# Altium PCB main.PcbDoc
Units mil, origin at the board's own origin, x right, y up, seen from the top; angles counter-clockwise.
Board outline 6000 x 4000 mil, 2 copper layers (Top Layer, Bottom Layer); 33 components, 25 nets, 214 pads, 0 vias.
Unrouted connection lines stored in the file: 136.
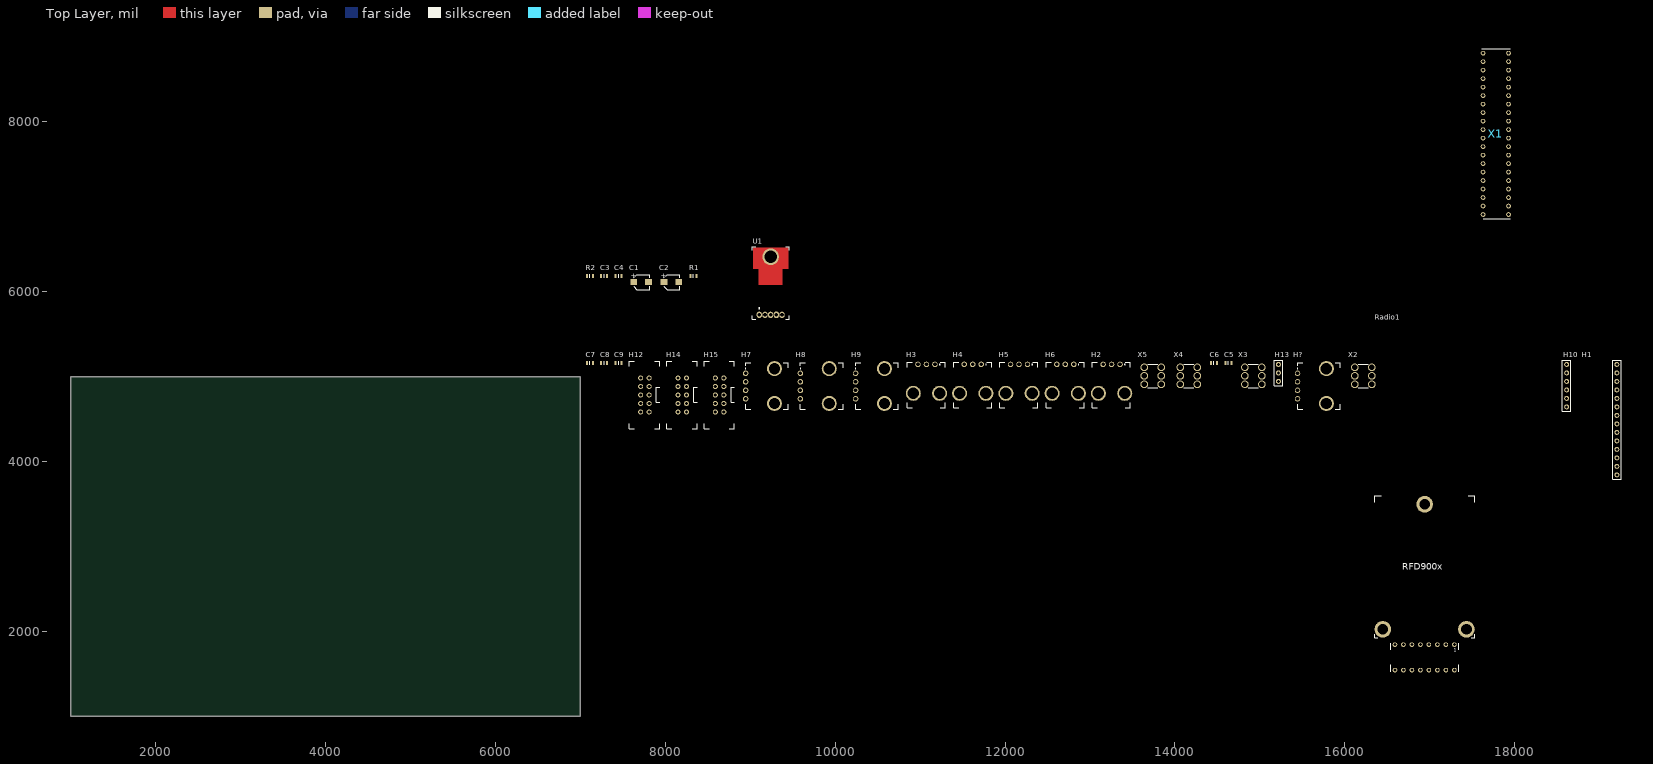
[diagram p0: Top Layer view]
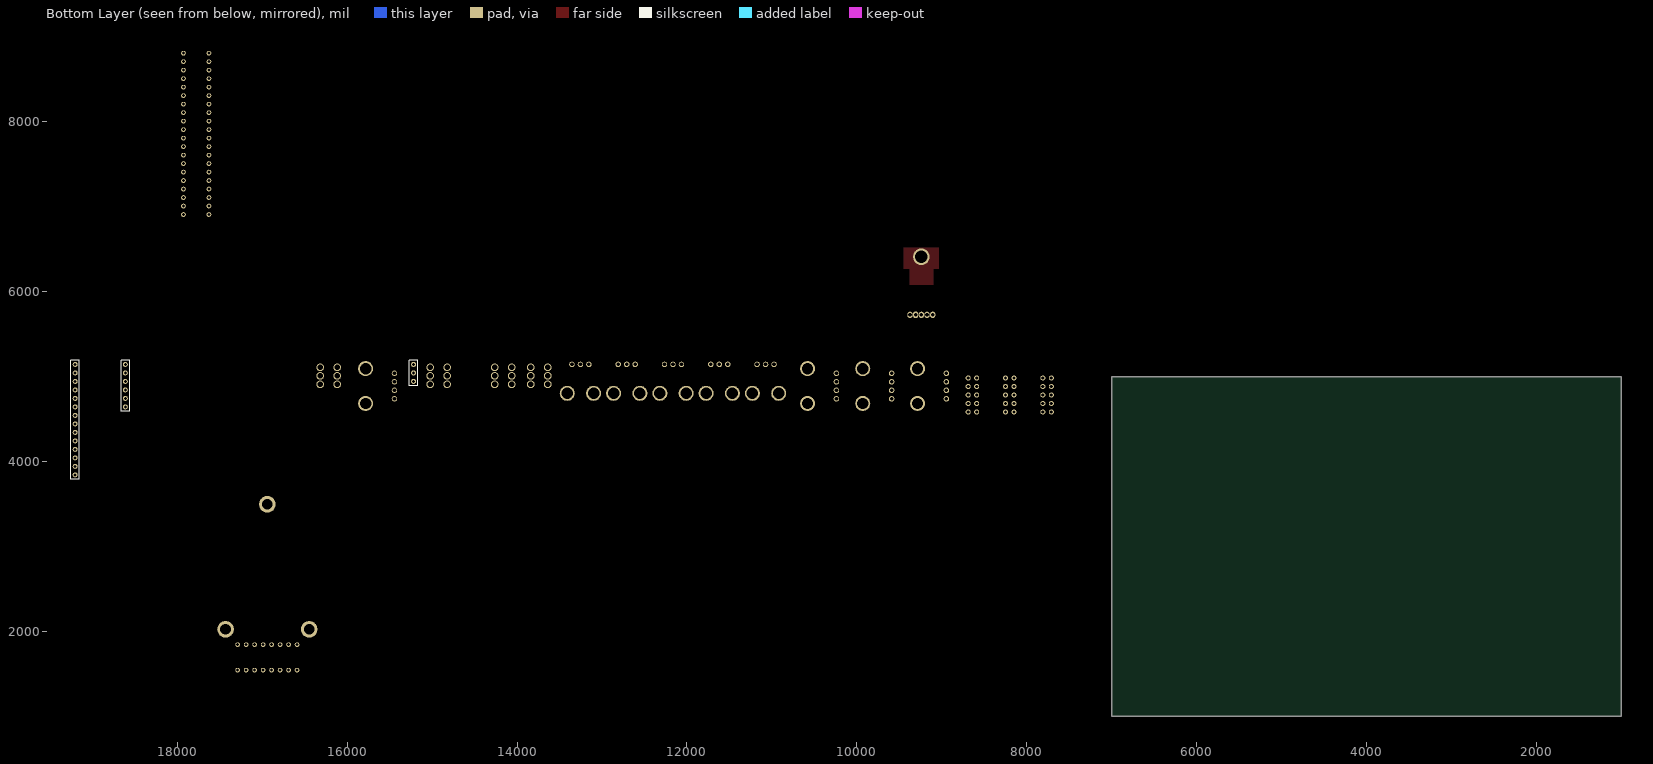
[diagram p1: Bottom Layer view, seen from below]

## Layer stack, top to bottom
Top Solder: solder mask 0.4, Solder Resist, Dk 3.5
Top Layer: signal copper 1.4
Dielectric 1: dielectric 12.6, FR-4, Dk 4.8
Bottom Layer: signal copper 1.4
Bottom Solder: solder mask 0.4, Solder Resist, Dk 3.5

## Board outline
1000,1000 7000,1000 7000,5000 1000,5000

## Design rules (kind name [scope] priority, off if disabled: settings)
BoardOutlineClearance [All] p1: gap=7.87 ignorepadtopadclearanceinfootprint=FALSE
Clearance "inPolygon Clearance" [InPolygon] p1: gap=11.81 ignorepadtopadclearanceinfootprint=TRUE // this rule ensures that every net within a polygon of a different net has a set clearance from the poly
Clearance "Different Diff Pair" [All] p2: gap=7.87 ignorepadtopadclearanceinfootprint=TRUE
Clearance "Same Diff Pair" [All] p3: gap=3.94 ignorepadtopadclearanceinfootprint=TRUE
Clearance "Different Nets" [not InAnyDifferentialPair] p4: gap=11.81 ignorepadtopadclearanceinfootprint=TRUE except(3.94: Arc-SMDPad Arc-THPad Arc-Via Arc-Text Track-SMDPad Track-THPad Track-Via Track-Text SMDPad-Text THPad-Text Via-Text Fill-Text Poly-Text Region-Text Text-Text; 4.72: Arc-Arc Arc-Track Track-Track; 5.91: SMDPad-SMDPad SMDPad-THPad SMDPad-Via THPad-THPad THPad-Via Via-Via; 7.87: Arc-Hole Track-Hole SMDPad-Hole THPad-Hole Via-Hole Fill-Hole Poly-Hole Region-Hole Text-Hole)
Clearance "Same Net" [not InAnyDifferentialPair] p5: gap=0 ignorepadtopadclearanceinfootprint=TRUE except(3.94: THPad-Via; 7.09: Arc-Arc Arc-Track Track-Track)
ComponentClearance [All] p1: gap=4 collisioncheckmode=3 verticalgap=4 showdistances=TRUE
DiffPairsRouting "Ethernet Routing" [InDifferentialPairClass('Ethernet_Pairs')] p1: maxlimit=7.87 minlimit=7.87 mostfreqgap=7.87 toplayer_minwidth=9.84 toplayer_maxwidth=9.84 toplayer_prefwidth=9.84 bottomlayer_minwidth=9.84 bottomlayer_maxwidth=9.84 bottomlayer_prefwidth=9.84 impedanceprofiledriven=TRUE impedanceprofileid={6C839EF7-FC3E-46DE-8B8A-5992B6406308} maxuncoupledlength=500
DiffPairsRouting "USB Routing" [InDifferentialPairClass('USB_Pairs')] p2: maxlimit=4.99 minlimit=4.99 mostfreqgap=4.99 toplayer_minwidth=9.07 toplayer_maxwidth=9.07 toplayer_prefwidth=9.07 bottomlayer_minwidth=9.07 bottomlayer_maxwidth=9.07 bottomlayer_prefwidth=9.07 impedanceprofiledriven=TRUE impedanceprofileid={44F334F2-7DCA-476F-8978-DAF7B35AC101} maxuncoupledlength=500
DiffPairsRouting "CAN Routing" [InDifferentialPairClass('CAN_Pairs')] p3: maxlimit=19.68 minlimit=19.68 mostfreqgap=19.68 toplayer_minwidth=7.93 toplayer_maxwidth=7.93 toplayer_prefwidth=7.93 bottomlayer_minwidth=7.93 bottomlayer_maxwidth=7.93 bottomlayer_prefwidth=7.93 impedanceprofiledriven=TRUE impedanceprofileid={655150C0-0DB8-45A2-9C08-8742605C1D3F} maxuncoupledlength=500
Height [All] p1: minheight=0 maxheight=71497.94 prefheight=500
HoleSize [All] p1: absolutevalues=TRUE maxlimit=248.03 minlimit=11.81 maxpercent=80.000 minpercent=20.000
HoleToHoleClearance [All] p1: gap=9.84 allowstackedmicrovias=FALSE
Length [All] p1: maxlimit=1709.92 minlimit=0 usedelayunits=TRUE mindelay=0.000000 maxdelay=10000.000000
MatchedLengths "Diff Pair Matched Delays" [InDifferentialPairClass('Ethernet_Pairs') or InDifferentialPairClass('USB_Pairs') or InDifferentialPairClass('CAN_Pairs')] p1: tolerance=196.85 checknetsindiffpair=TRUE checkdiffpairvsdiffpair=FALSE checkxsignals=FALSE checkothers=FALSE usedelayunits=TRUE delaytolerance=100.000000
MinimumAnnularRing [All] p1: minimumring=7.87
MinimumSolderMaskSliver [All] p1: minsoldermaskwidth=0
PlaneClearance "Supply Net Clearance" [InNetClass('Supply_Nets')] p1: clearance=19.68
PlaneClearance "All Nets" [All] p2: clearance=11.81
PolygonConnect "Supply Nets" [InNetClass('Supply_Nets')] p1: connectstyle=Direct reliefconductorwidth=11.81 reliefentries=4 polygonreliefangle="90 Angle" airgapwidth=10
PolygonConnect General [All] p2: connectstyle=Relief reliefconductorwidth=10 reliefentries=4 polygonreliefangle="90 Angle" airgapwidth=10
RoutingVias [All] p1: holewidth=7.87 width=13.78 viastyle="Through Hole" minholewidth=5.91 minwidth=11.81 maxholewidth=248.03 maxwidth=257.87
SilkToSilkClearance [All] p1: silktosilkclearance=0
SilkToSolderMaskClearance [All] p1: minsilkscreentomaskgap=0 clearancetoexposedcopper=TRUE
SolderMaskExpansion [All] p1: expansion=2.95 istentingtop=FALSE
SupplyNets "Schematic Supply Nets_8" [InNet('+1V1')] p1: voltage=0.000
SupplyNets "Schematic Supply Nets_7" [InNet('+3V3')] p2: voltage=0.000
SupplyNets "Schematic Supply Nets_3" [InNet('GND')] p3: voltage=0.000
SupplyNets "Schematic Supply Nets_5" [InNet('Local +5V')] p4: voltage=0.000
SupplyNets "Schematic Supply Nets_1" [InNet('Earth')] p5: voltage=0.000
SupplyNets "Schematic Supply Nets" [InNet('+12V')] p6: voltage=0.000
UnRoutedNet [All] p1: checkbadconnections=TRUE
Width [All] p1: maxlimit=3937.01 minlimit=3.94 preferedwidth=11.81
Width "nRF Width" [InNetClass('nRF Signal')] p2: maxlimit=14.94 minlimit=14.94 preferedwidth=14.94 impedanceprofiledriven=TRUE impedanceprofileid={F40AD8AA-2A64-4F02-A627-F394B910E812} minimp=50.000000 maximp=50.000000 favimp=50.000000 checkconnectedcopper=TRUE
20 further rules are at their usual default settings.

## Classes and differential pairs
net class "Motor VOUT": "Battery VIN"
component class Power: C1 C2 C3 C4 R1 R2 U1
component class Devices: C5 C6 C7 C8 C9 H1 H2 H3 H4 H5 H6 H7 H8 H9 H10 H12 H13 H14 H15 H? Radio1 X1 X2 X3 X4 X5

## Components (designator, comment, footprint, x,y, rotation, side; value= is the part's Value field where it differs from the comment)
C1 "SMD Polarized" "[Cap] SMD Polarized, 4mm" 7715,6115 r0 top
C2 "SMD Polarized" "[Cap] SMD Polarized, 4mm" 8070,6115 r0 top
C3 "SMD Nonpolarized" "[Cap] SMD 0805" 7280,6185 r0 top
C4 "SMD Nonpolarized" "[Cap] SMD 0805" 7450,6185 r0 top
C5 "SMD Nonpolarized" "[Cap] SMD 0805" 14630,5160 r0 top
C6 "SMD Nonpolarized" "[Cap] SMD 0805" 14460,5160 r0 top
C7 "SMD Nonpolarized" "[Cap] SMD 0805" 7110,5160 r0 top
C8 "SMD Nonpolarized" "[Cap] SMD 0805" 7280,5160 r0 top
C9 "SMD Nonpolarized" "[Cap] SMD 0805" 7450,5160 r0 top
H1 "1x14 Male Right Angle" "[Header] 1x14 Right Angle Male" 19205,3845 r90 top
H2 "171975-0003" "[Header] Shrouded 1x3 Right Angle Male" 13255,5145 r0 top
H3 "171975-0003" "[Header] Shrouded 1x3 Right Angle Male" 11075,5145 r0 top
H4 "171975-0003" "[Header] Shrouded 1x3 Right Angle Male" 11620,5145 r0 top
H5 "171975-0003" "[Header] Shrouded 1x3 Right Angle Male" 12165,5145 r0 top
H6 "171975-0003" "[Header] Shrouded 1x3 Right Angle Male" 12710,5145 r0 top
H7 "171975-0004" "[Header] Shrouded 1x4 Right Angle Male" 8945,4890 r90 top
H8 "171975-0004" "[Header] Shrouded 1x4 Right Angle Male" 9590,4890 r90 top
H9 "171975-0004" "[Header] Shrouded 1x4 Right Angle Male" 10240,4890 r90 top
H10 "1x6 Header" "[Header] 1x6 Male" 18615,4895 r90 top
H12 "2x5 Shrouded" "[Header] Shrouded 2x5 Male" 7755,4785 r90 top
H13 "1x3 Header" "[Header] 1x3 Male" 15220,5045 r90 top
H14 "2x5 Shrouded" "[Header] Shrouded 2x5 Male" 8195,4785 r90 top
H15 "2x5 Shrouded" "[Header] Shrouded 2x5 Male" 8635,4785 r90 top
H? "171975-0004" "[Header] Shrouded 1x4 Right Angle Male" 15445,4890 r90 top
R1 "[Res] SMD Resistor" "[Res] SMD 0805" 8330,6185 r0 top
R2 "[Res] SMD Resistor" "[Res] SMD 0805" 7110,6185 r0 top
Radio1 "RFDX900" "[Device] RFDX900 Radio" 16942.14,1694.49 r0 top
U1 "5V" "[Reg] Variable Voltage Regulator" 9240,6105 r0 top
X1 "Raspberry Pi 5" "[Device] Raspberry Pi 5" 17930,6910 r90 top
X2 "7461057" "[Port] Shank Connector (100A)" 16220,5010 r0 top
X3 "7461057" "[Port] Shank Connector (100A)" 14925,5010 r0 top
X4 "7461057" "[Port] Shank Connector (100A)" 14165,5010 r0 top
X5 "7461057" "[Port] Shank Connector (100A)" 13740,5010 r0 top

## Footprints (in the part's own frame and the unit in brackets; to place one, negate y for a bottom-side part, rotate by r counter-clockwise, add the part's x,y. Pads: shape width x height; smd on the part's side, far side on the other; paste and mask are expansions set on the pad)
"[Cap] SMD 0805" [mm]
  rect 0.6x1.25 smd: 1(-0.9,0) 2(0.9,0)
  silkscreen extent 0,-0.53 0,0.53, body extent -1,-0.63 1,0.63, height 1
"[Cap] SMD Polarized, 4mm" [mm]
  rect 2x1.8 smd: 1(-2.2,0) 2(2.2,0)
  silkscreen extent -2.25,-2.25 2.6,2.25, body extent -2.6,-2.25 2.6,2.25, height 5.66
"[Device] Raspberry Pi 5" [mm]
  round 1.4 hole 0.9: 1(48.26,7.62) 2(48.26,0) 3(45.72,7.62) 4(45.72,0) 5(43.18,7.62) 7(40.64,7.62) 8(40.64,0) 10(38.1,0) 11(35.56,7.62) 12(35.56,0) 13(33.02,7.62) 15(30.48,7.62) 16(30.48,0) 17(27.94,7.62) 18(27.94,0) 19(25.4,7.62) 20(25.4,0) 21(22.86,7.62) 22(22.86,0) 23(20.32,7.62) 24(20.32,0) 26(17.78,0) 27(15.24,7.62) 28(15.24,0) 29(12.7,7.62) 31(10.16,7.62) 32(10.16,0) 33(7.62,7.62) 35(5.08,7.62) 36(5.08,0) 37(2.54,7.62) 38(2.54,0) 40(0,0) GND(0,7.62) GND(7.62,0) GND(12.7,0) GND(17.78,7.62) GND(33.02,0) GND(38.1,7.62) GND(43.18,0)
  silkscreen extent -1.27,-0.44 49.53,8.06, body extent -32.39,-7.99 56.65,12.65, height 56.94
"[Device] RFDX900 Radio" [mm] "RFDX900 Long-Range RF Module"
  round 1.4 hole 0.9: 1(8.89,-3.81) 2(8.89,3.81) 3(6.35,-3.81) 4(6.35,3.81) 5(3.81,-3.81) 6(3.81,3.81) 7(1.27,-3.81) 8(1.27,3.81) 9(-1.27,-3.81) 10(-1.27,3.81) 11(-3.81,-3.81) 12(-3.81,3.81) 13(-6.35,-3.81) 14(-6.35,3.81) 15(-8.89,-3.81) 16(-8.89,3.81)
  round 5 hole 3.2: X(-12.5,8.395) X(0,45.795) X(12.5,8.395)
  silkscreen extent -15,-4.25 15,48.4, body extent -15,-4.25 15,100.2, height 12.75
"[Header] 1x3 Male" [mm]
  round 1.5 hole 0.9: 1(-2.54,0) 2(0,0) 3(2.54,0)
  silkscreen extent -3.81,-1.27 3.81,1.27, body extent -3.81,-1.27 3.81,1.27, height 9.5
"[Header] 1x6 Male" [mm]
  round 1.5 hole 0.9: 1(-6.35,0) 2(-3.81,0) 3(-1.27,0) 4(1.27,0) 5(3.81,0) 6(6.35,0)
  silkscreen extent -7.62,-1.27 7.62,1.27, body extent -7.62,-1.27 7.62,1.27, height 9.5
"[Header] 1x14 Right Angle Male" [mm]
  round 1.5 hole 0.9: 1(0,0) 2(2.54,0) 3(5.08,0) 4(7.62,0) 5(10.16,0) 6(12.7,0) 7(15.24,0) 8(17.78,0) 9(20.32,0) 10(22.86,0) 11(25.4,0) 12(27.94,0) 13(30.48,0) 14(33.02,0)
  silkscreen extent -1.27,-1.27 34.29,1.27, body extent -1.3,-0.32 34.27,10.8, height 3.09
"[Header] Shrouded 1x3 Right Angle Male" [mm] "171975-0003 / Mates with 0050579403"
  round 1.635 hole 1.09: 1(2.54,0) 2(0,0) 3(-2.54,0)
  round 4.5 hole 3.45 unplated: MH1(3.94,-8.64) MH2(-3.94,-8.64)
  silkscreen extent -5.71,-12.91 5.65,0.68, body extent -5.71,-12.91 5.65,0.68, height 6.88
"[Header] Shrouded 1x4 Right Angle Male" [mm] "171975-0004 / Mates with 0050579404"
  round 1.635 hole 1.09: 1(3.81,0) 2(1.27,0) 3(-1.27,0) 4(-3.81,0)
  round 4.5 hole 3.4: MH1(5.21,-8.64) MH2(-5.21,-8.64)
  silkscreen extent -6.95,-12.81 6.98,0.1, body extent -6.92,-12.81 6.98,0.78, height 6.9
"[Header] Shrouded 2x5 Male" [mm]
  round 1.5 hole 1: 1(-5.08,-1.37) 2(-5.08,1.17) 3(-2.54,-1.37) 4(-2.54,1.17) 5(0,-1.37) 6(0,1.17) 7(2.54,-1.37) 8(2.54,1.17) 9(5.08,-1.37) 10(5.08,1.17)
  silkscreen extent -10.15,-4.52 10.15,4.52, body extent -10.15,-4.52 10.15,4.52, height 8.8
"[Port] Shank Connector (100A)" [mm]
  round 2.3 hole 1.6: 1(-2.54,-2.54) 1(-2.54,0) 1(-2.54,2.54) 1(2.54,-2.54) 1(2.54,0) 1(2.54,2.54)
  silkscreen extent -1.5,-3.5 1.5,3.5, body extent -3.5,-3.5 3.5,3.5, height 6
"[Reg] Variable Voltage Regulator" [mm] "MIC29302WT"
  oval 1.55x1.9 hole 1.1: 1(-3.4,-9.563) 2(-1.7,-9.563) 3(0,-9.563) 5(3.4,-9.563)
  oval 1.58x2 hole 1.1: 4(1.7,-9.563)
  round 0.025 smd: X(0,5.011)
  round 5 hole 3.75: X(0,7.813)
  Top Layer region: -5.25,4.236 -3.5,4.236 -3.5,-0.489 3.5,-0.489 3.5,4.236 5.25,4.236 5.25,10.511 -5.25,10.511
  silkscreen extent -5.5,-10.81 5.5,10.81, body extent -5.08,-9.77 5.08,10.4, height 5.06
"[Res] SMD 0805" [mm]
  rect 0.6x1.25 smd: 1(-0.9,0) 2(0.9,0)
  silkscreen extent 0,-0.53 0,0.53, body extent -1,-0.63 1,0.63, height 0.5

## Part data
C1 C2: library part "[Cap] SMD Polarized", Capacitance=47uF, Diameter=4mm
C3 C4: library part "[Cap] SMD Nonpolarized", Capacitance=0.1uF, Size Package=0805
C5 C6 C7 C8 C9: library part "[Cap] SMD Nonpolarized", Capacitance=100nF, Size Package=0805
H1: library part "[Header] 1x14 Right Angle Male", "2.54mm pitch"
H2 H3 H4 H5 H6: library part "[Header] Shrouded 1x3 Right Angle Male", "171975-0003 / Mates with 0050579403"
H7 H8 H9 H?: library part "[Header] Shrouded 1x4 Right Angle Male", "171975-0004 / Mates with 0050579404"
H10: library part "[Header] 1x6 Male", "2.54mm pitch"
H12 H14 H15: library part "[Header] Shrouded 2x5 Male", "BHR-10-VUA"
H13: library part "[Header] 1x3 Male", "2.54mm pitch"
R1: Resistance=1k, Size Package=0805
R2: Resistance=330, Size Package=0805
Radio1: library part "[Device] RFDX900 Radio", "RFDX900 Long-Range RF Module"
U1: library part "[Reg] Variable Voltage Regulator", "MIC29302WT"
X1: library part "[Device] Raspberry Pi 5"
X2 X3 X4 X5: library part "[Port] Shank Connector (100A)", "7461057, internal thread"

## Nets (pads, with @x,y where several pads share a name; then routed paths per layer and width w, separated by ;. In a path a pad name is that pad's centre, name@x,y a point inside that pad or via, vN(x,y) a via of type N, cw(c..) or ccw(c..) an arc to the next point about the centre after c; other vN are vias at no path point)
+5V: C2.1 C4.2 C5.1 C6.1 C7.2 C8.2 C9.2 H3.2 H4.2 H5.2 H6.2 H7.1 H8.1 H9.1 H12.1 H12.2 H14.1 H14.2 H15.1 H15.2 R1.2 Radio1.4 U1.4
"AUX Out 1": H1.14 H3.3
"AUX Out 2": H1.13 H4.3
"AUX Out 3": H1.12 H5.3
"AUX Out 4": H1.11 H6.3
"Battery RX": H2.2 X1.8
"Battery TX": H2.3 X1.10
"Battery VIN": C1.1 C3.2 U1.1 U1.2 X2.1 X3.1
"Control 1": H12.5 H12.6 H14.5 H14.6 H15.5 H15.6
"Control 2": H12.7 H12.8 H14.7 H14.8 H15.7 H15.8
Earth: H2.MH1 H2.MH2 H3.MH1 H3.MH2 H4.MH1 H4.MH2 H5.MH1 H5.MH2 H6.MH1 H6.MH2 H7.MH1 H7.MH2 H8.MH1 H8.MH2 H9.MH1 H9.MH2
GND: C1.2 C2.2 C3.1 C4.1 C5.2 C6.2 C7.1 C8.1 C9.1 H2.1 H3.1 H4.1 H5.1 H6.1 H7.4 H8.4 H9.4 H10.6 H12.9 H12.10 H14.9 H14.10 H15.9 H15.10 H?.4 R2.1 Radio1.1 Radio1.2 Radio1.16 U1.3 X1.GND X4.1 X5.1
"Main Out 1": H1.8 H12.3
"Main Out 2": H1.7 H12.4
"Main Out 3": H1.6 H14.3
"Main Out 4": H1.5 H14.4
"Main Out 5": H1.4 H15.3
"Main Out 6": H1.3 H15.4
NetR1_1: R1.1 R2.2 U1.5
"Radio CTS": H10.4 Radio1.3
"Radio RTS": H10.5 Radio1.11
"Radio RX": H10.2 Radio1.7
"Radio TX": H10.3 Radio1.9
SCL: H7.3 H8.3 H9.3 H?.2 X1.5
SDA: H7.2 H8.2 H9.2 H?.3 X1.3
pads on no net: H1.1 H1.2 H1.9 H1.10 H10.1 H13.1 H13.2 H13.3 H?.1 H?.MH1 H?.MH2 Radio1.5 Radio1.6 Radio1.8 Radio1.10 Radio1.12 Radio1.13 Radio1.14 Radio1.15 Radio1.X U1.X X1.1 X1.2 X1.4 X1.7 X1.11 X1.12 X1.13 X1.15 X1.16 X1.17 X1.18 X1.19 X1.20 X1.21 X1.22 X1.23 X1.24 X1.26 X1.27 X1.28 X1.29 X1.31 X1.32 X1.33 X1.35 X1.36 X1.37 X1.38 X1.40

## Text inside footprints (layer, text, board x,y; h text height)
C1: Top Overlay "+" at 7590.32,6160.48 h59.06
C2: Top Overlay "+" at 7945.32,6160.48 h59.06
Radio1: Top Overlay "RFD900x" at 16679.76,2723.83 h78.74; Top Overlay "1" at 17285.58,1763.4 h39.37